# EAGLE board tiny13_charlie4_50mm (EAGLE 6.2)
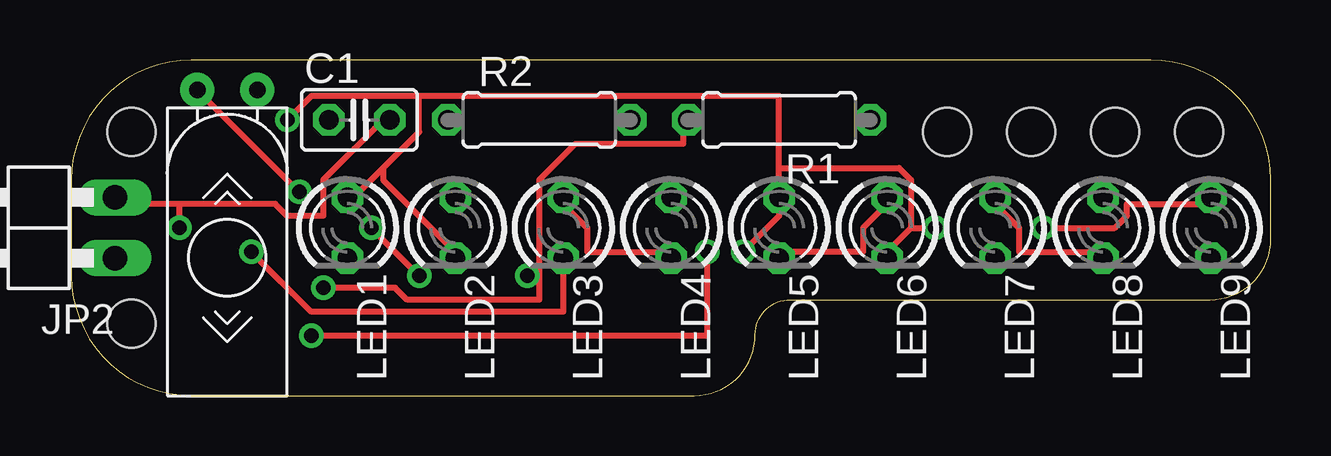
[diagram p0: board, top side]
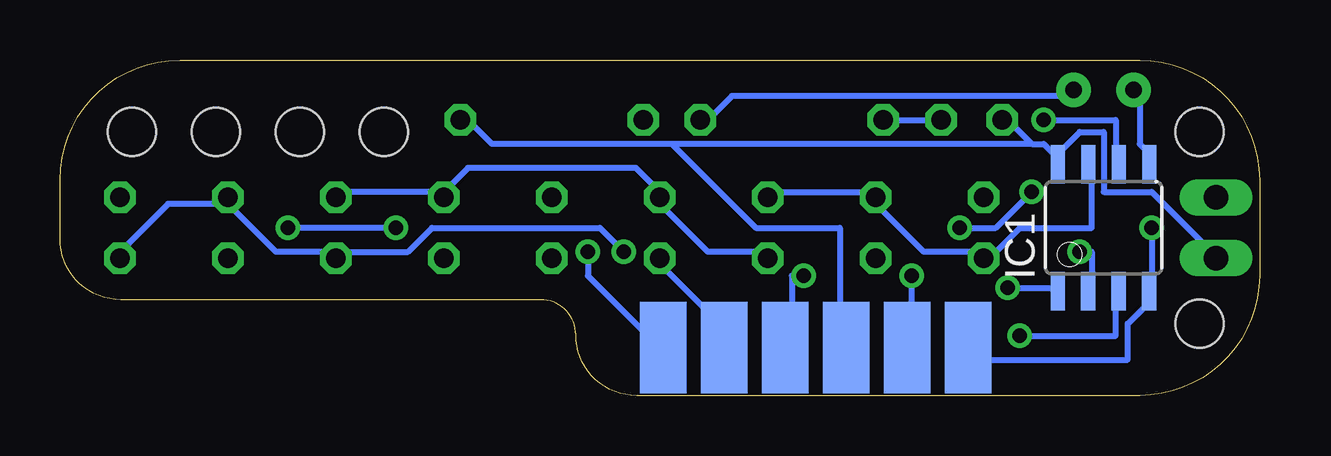
[diagram p1: board, bottom side, seen from below]

Size 50 x 14 mm. Coordinates in mm from the lower left corner, seen from the top.
Outline: 5,0 25.96,0 arc90 28.5,2.54 arc-90 29.96,4 47.46,4 arc90 50,6.54 50,9 arc90 45,14 5,14 arc90 0,9 0,5 arc90 5,0
Copper layers (1*16): Top 0.035mm / dielectric 1.5mm / Bottom 0.035mm
Design rules: minimum track width 10mil, minimum drill 24mil, track to track 8mil, track to pad 8mil, pad to pad 8mil, via to via 8mil, smd to smd 8mil, copper to edge 40mil, drill to drill 8mil, minimum pad ring 10mil, minimum via ring 8mil, stop-mask expansion 4mil, vias tented up to drill 0mil, thermal gap 10mil
Holes 2 mm at 2.5,11 2.5,3 47,11 43.5,11 40,11 36.5,11

## Footprints (pad centres in the part's own frame; a part is rotated, then mirrored left to right if it is on the bottom)
C025-025X050 = drill 0.813 octagon: 1 -1.27,0; 2 1.27,0
8S1 = smd 0.6 x 1.6: 1 -1.905,-2.654; 2 -0.645,-2.654; 3 0.625,-2.654; 4 1.895,-2.654; 5 1.905,2.654; 6 0.635,2.654; 7 -0.635,2.654; 8 -1.905,2.654
1X02/90 = drill 1.016 long: 1 -1.27,-3.81; 2 1.27,-3.81
LED3MM = drill 0.813 octagon: A -1.27,0; K 1.27,0
0207/7 = drill 0.813 octagon: 1 -3.81,0; 2 3.81,0
TILT_SWITCH_MECHANICAL = drill 0.7 pad 1.422: P$1 -0.75,1.25; P$2 -0.75,3.75
CONTACT_ISP_PROGRAMMER_1X6_ATMEL = smd 1.93 x 3.81: GND 6.35,0; MISO -6.35,0; MOSI 3.81,0; RST -1.27,0; SCK -3.81,0; VCC 1.27,0

## Placement (x,y rotation side)
C1  [C025-025X050]  12,11.5 0 top
IC1  TINY13-20SSU  [8S1]  6.5,7 0 bottom
JP2  [1X02/90]  -2,7 90 top
LED1  [LED3MM]  11.5,7 270 top
LED2  [LED3MM]  16,7 270 top
LED3  [LED3MM]  20.5,7 270 top
LED4  [LED3MM]  25,7 270 top
LED5  [LED3MM]  29.5,7 270 top
LED6  [LED3MM]  34,7 270 top
LED7  [LED3MM]  38.5,7 270 top
LED8  [LED3MM]  43,7 270 top
LED9  [LED3MM]  47.5,7 270 top
R1  [0207/7]  29.5,11.5 180 top
R2  [0207/7]  19.5,11.5 0 top
U$1  TILT_SWITCH_MECHANICAL  [TILT_SWITCH_MECHANICAL]  4,12 270 top
U$2  AVR_ISP_6_PIN_1X6_SMT_CONTACT_PROGRAMMER  [CONTACT_ISP_PROGRAMMER_1X6_ATMEL]  18.5,2 0 bottom

## Library data of the parts
C1 R1 R2 = resistor
IC1 = atmel; MPN: ATTINY13-20SSU; OC_FARNELL: 1455133; OC_NEWARK: 58M3771
JP2 = pinhead
LED1-LED9 = 0-svo
U$1 U$2 = Mrule

## Nets
GND: C1.2 IC1.4 JP2.2 R2.1 U$2.GND
N$1: IC1.2 LED3.K LED4.A LED5.K LED6.A LED7.A LED8.K
N$2: IC1.7 LED1.K LED2.A LED3.A LED4.K U$2.SCK
N$3: R2.2 U$1.P$2
N$4: IC1.3 LED7.K LED8.A LED9.K
N$5: IC1.5 U$1.P$1 U$2.MOSI
N$6: IC1.1 R1.2 U$2.RST
N$8: IC1.6 LED1.A LED2.K LED5.A LED6.K LED9.A U$2.MISO
VCC: C1.1 IC1.8 JP2.1 R1.1 U$2.VCC

## Tracks (layer width: path | path; a pad name or v marks a point on that pad's centre or on a via)
GND  (via drill 0.61)
  Top 0.254: 4.5,8 8.5,8 9,7.5 10.5,7.5 10.5,9 13,11.5 C1.2 | 4.5,8 2,8 JP2.2 | 4.5,8 v4.5,7
  Bottom 0.254: U$2.GND 12,2 11.5,1.5 5.5,1.5 5.5,3 4.5,4 IC1.4 4.5,4.5 v4.5,7 | R2.1 C1.2
N$1  (via drill 0.61)
  Top 0.254: LED5.K 29.5,6 33,6 33,7 34,8 LED6.A | LED8.K 43,6 39.5,6 39.5,7 38.5,8 LED7.A | v7.5,6 10,3.5 20.5,3.5 LED3.K
  Bottom 0.254: 34,8.5 38.5,8.5 LED7.A | v7.5,6 7,6 7,4.5 IC1.2 | LED3.K 20.5,6 23,6 25,8 LED4.A 25,8.5 26,9.5 33,9.5 34,8.5 | 34,8.5 LED6.A
N$2
  Top 0.254: LED4.K 25,6 21.5,6 21.5,7 20.5,8 LED3.A
  Bottom 0.254: LED4.K 25,5.5 22.5,3 22.5,2 U$2.SCK | LED3.A 20.5,8.5 16,8.5 LED2.A 16,8 14,6 11.5,6 | 11.5,6 11,6 10,7 7,7 7,9.5 IC1.7 | 11.5,6 LED1.K
N$3
  Bottom 0.254: R2.2 23,11.5 22,12.5 8,12.5 U$1.P$2
N$4  (via drill 0.61)
  Top 0.254: v10,2.5 26.5,2.5 v26.5,6
  Bottom 0.254: v10,2.5 6,2.5 6,4 IC1.3 | v26.5,6 27.5,7 34.5,7 35.5,6 38.5,6 | 43,8 41,6 38.5,6 | 38.5,6 LED7.K | 43,8 45.5,8 47.5,6 LED9.K | 43,8 LED8.A
N$5  (via drill 0.61)
  Top 0.254: v9.5,8.5 U$1.P$1 | v14.5,5 v12.5,7
  Bottom 0.254: IC1.5 4.5,10 5,10.5 5,12.5 U$1.P$1 | v9.5,8.5 11,7 v12.5,7 | v14.5,5 14.5,2 U$2.MOSI
N$6  (via drill 0.61)
  Top 0.254: v10.5,4.5 13.5,4.5 14,4 19.5,4 19.5,5 | 19.5,5 19.5,9 21,10.5 25.5,10.5 25.5,11.5 R1.2 | 19.5,5 v19,5
  Bottom 0.254: v10.5,4.5 8.5,4.5 IC1.1 | v19,5 19.5,5 19.5,2 U$2.RST
N$8  (via drill 0.61)
  Top 0.254: v9,11.5 10,12.5 14.5,12.5 | 14.5,12.5 14.5,11 13,9.5 | 13,9.5 11.5,8 LED1.A | 13,9.5 13,9 16,6 LED2.K | 35,7 34,6 LED6.K | 35,7 35,9 34.5,9.5 29.5,9.5 | 29.5,9.5 LED5.A 29.5,7.5 v28,6 | v40.5,7 43.5,7 44,7.5 44,8 47.5,8 LED9.A | 35,7 v36,7 | 14.5,12.5 29.5,12.5 29.5,9.5
  Bottom 0.254: v9,11.5 6,11.5 6,10 IC1.6 | v36,7 v40.5,7 | v28,6 28,5 25,2 U$2.MISO
VCC
  Bottom 0.254: 8.5,10 9,10.5 9.5,10.5 | 9.5,10.5 10.5,11.5 C1.1 | 9.5,10.5 24.5,10.5 | 24.5,10.5 32,10.5 33,11.5 R1.1 | 8.5,10 7.5,11 6.5,11 6.5,8.5 4.5,8.5 2,6 JP2.1 | 8.5,10 IC1.8 | 24.5,10.5 21,7 17.5,7 17.5,2 U$2.VCC